# Altium PCB v2.PcbDoc
Units mm, origin at the board's own origin, x right, y up, seen from the top; angles counter-clockwise.
Board outline 87.45 x 94.54 mm, 4 copper layers (Top Layer, GND, PWR, Bottom Layer), stack 0.603 mm thick; 80 components, 70 nets, 340 pads, 95 vias.
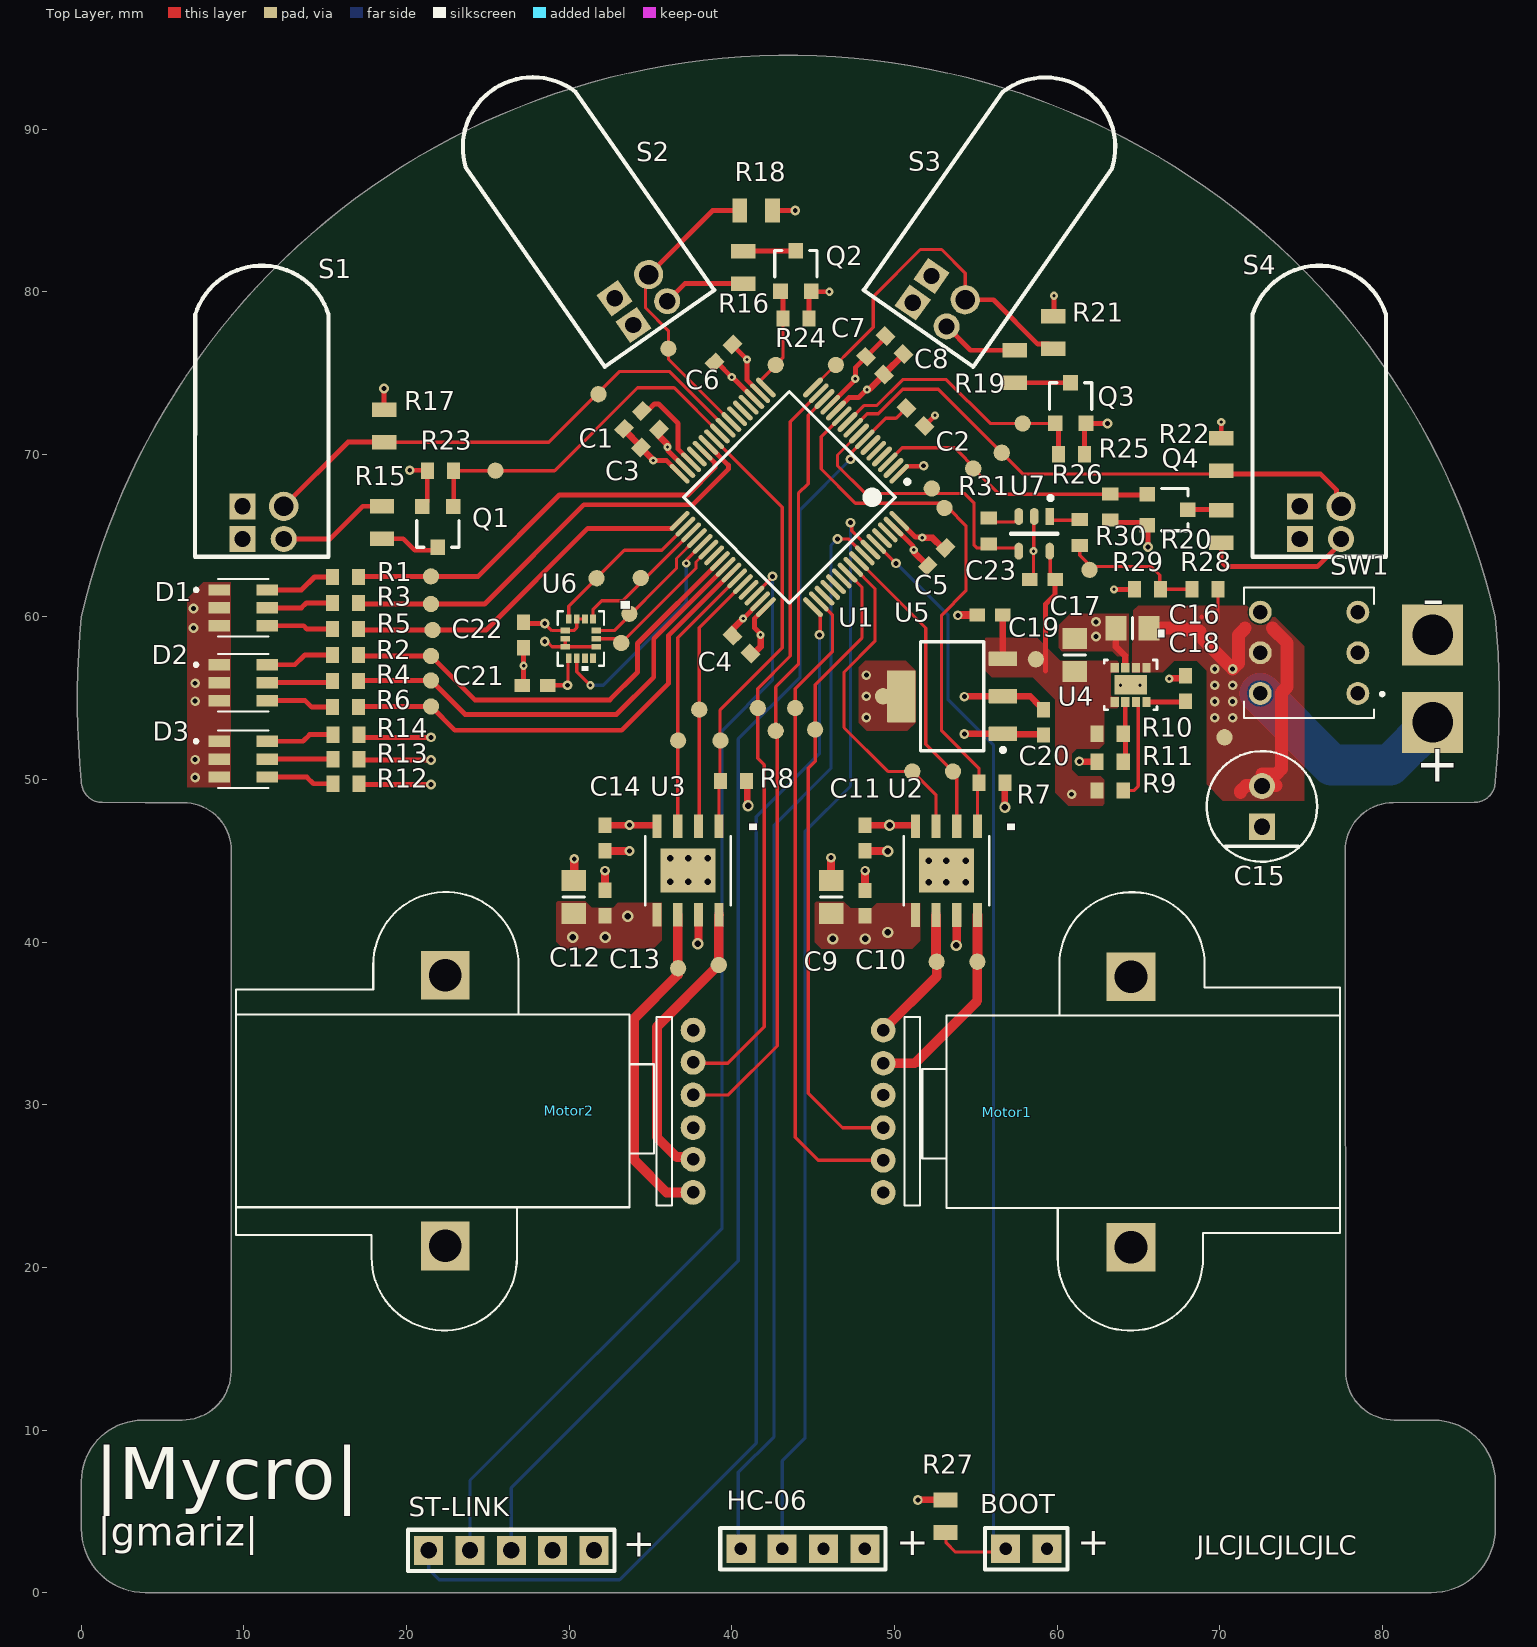
[diagram p0: Top Layer view]
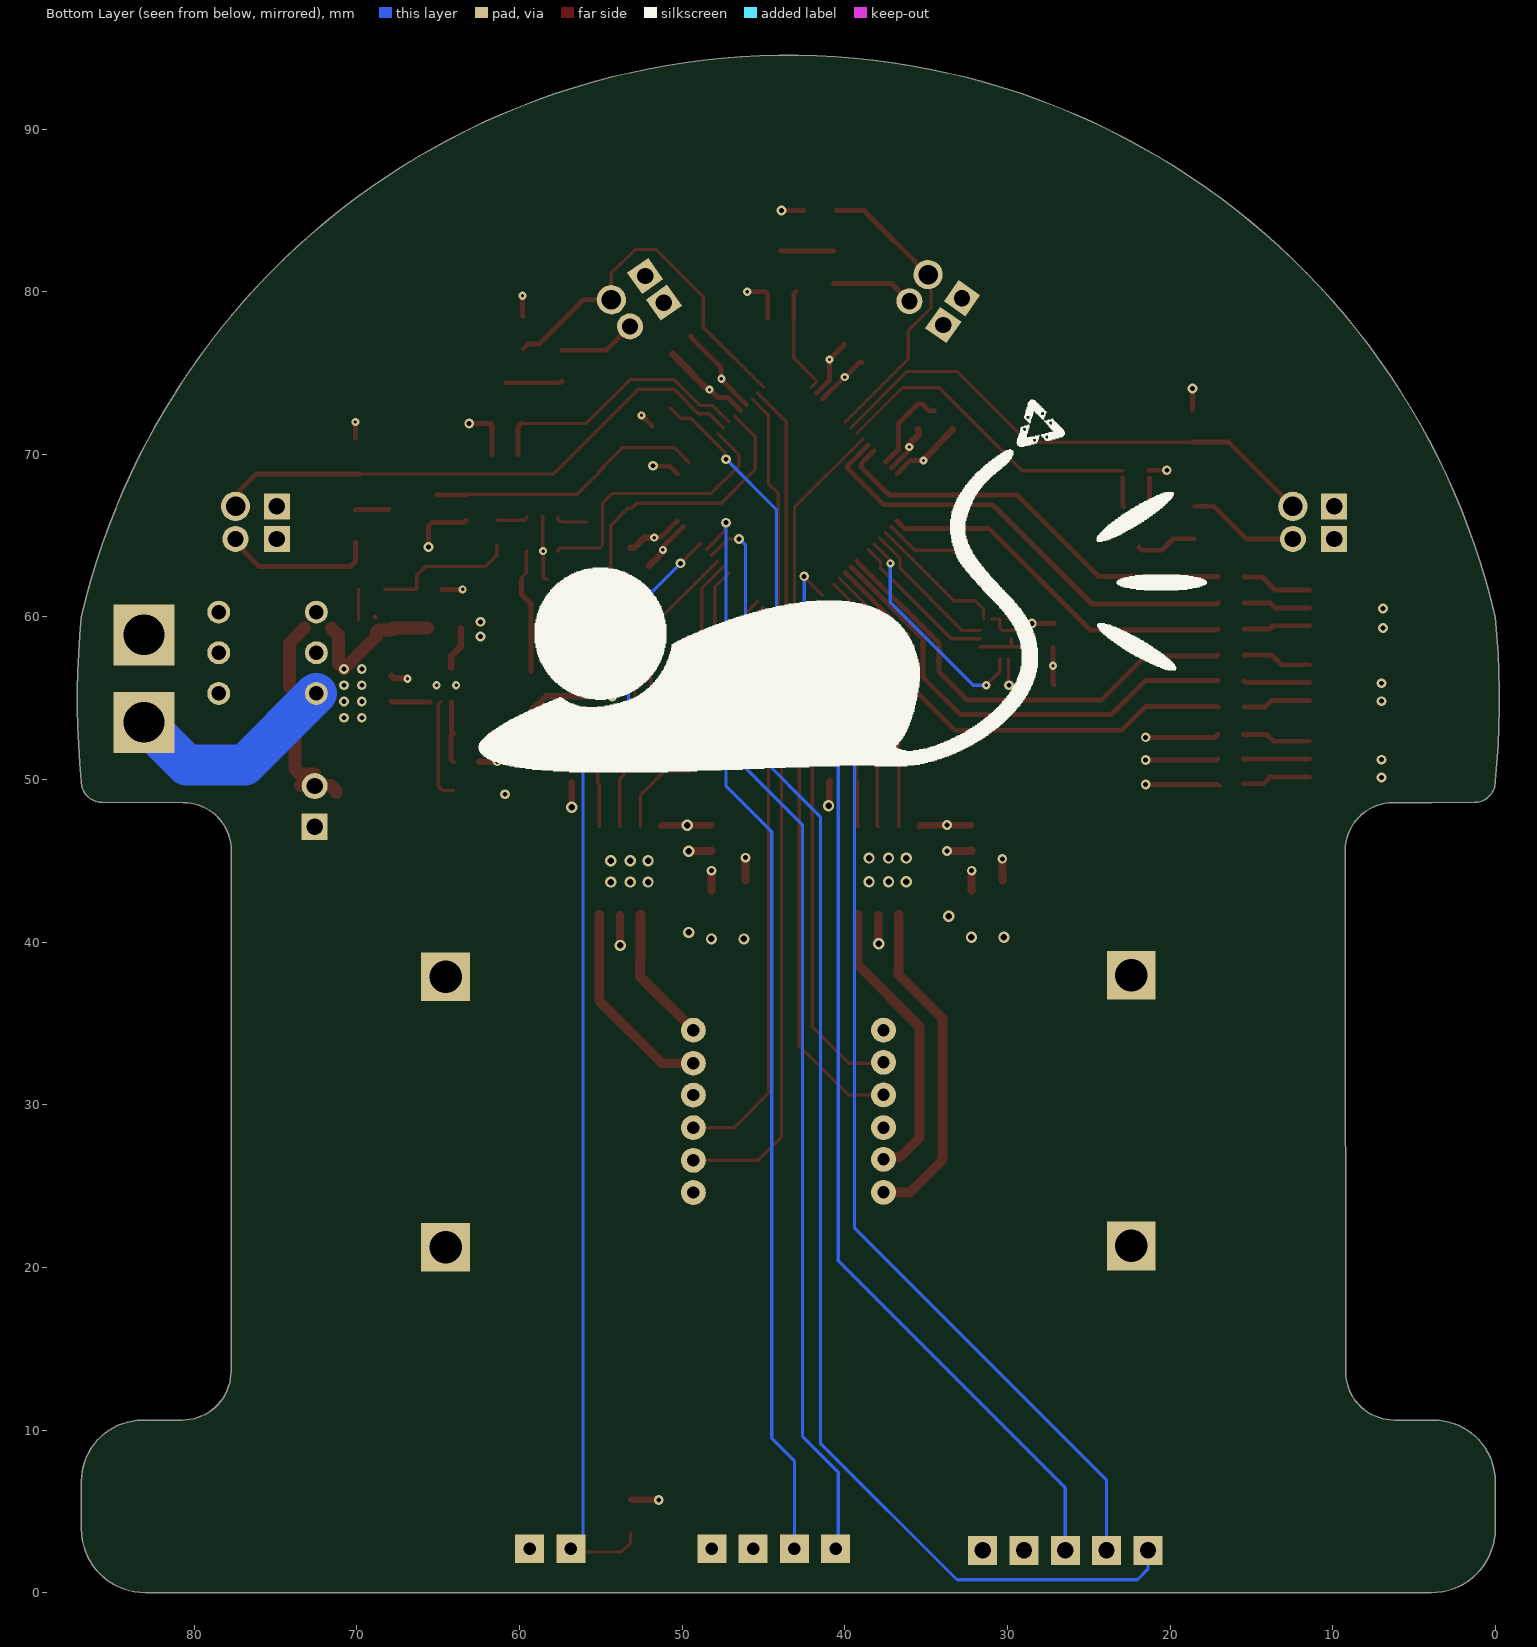
[diagram p1: Bottom Layer view, seen from below]
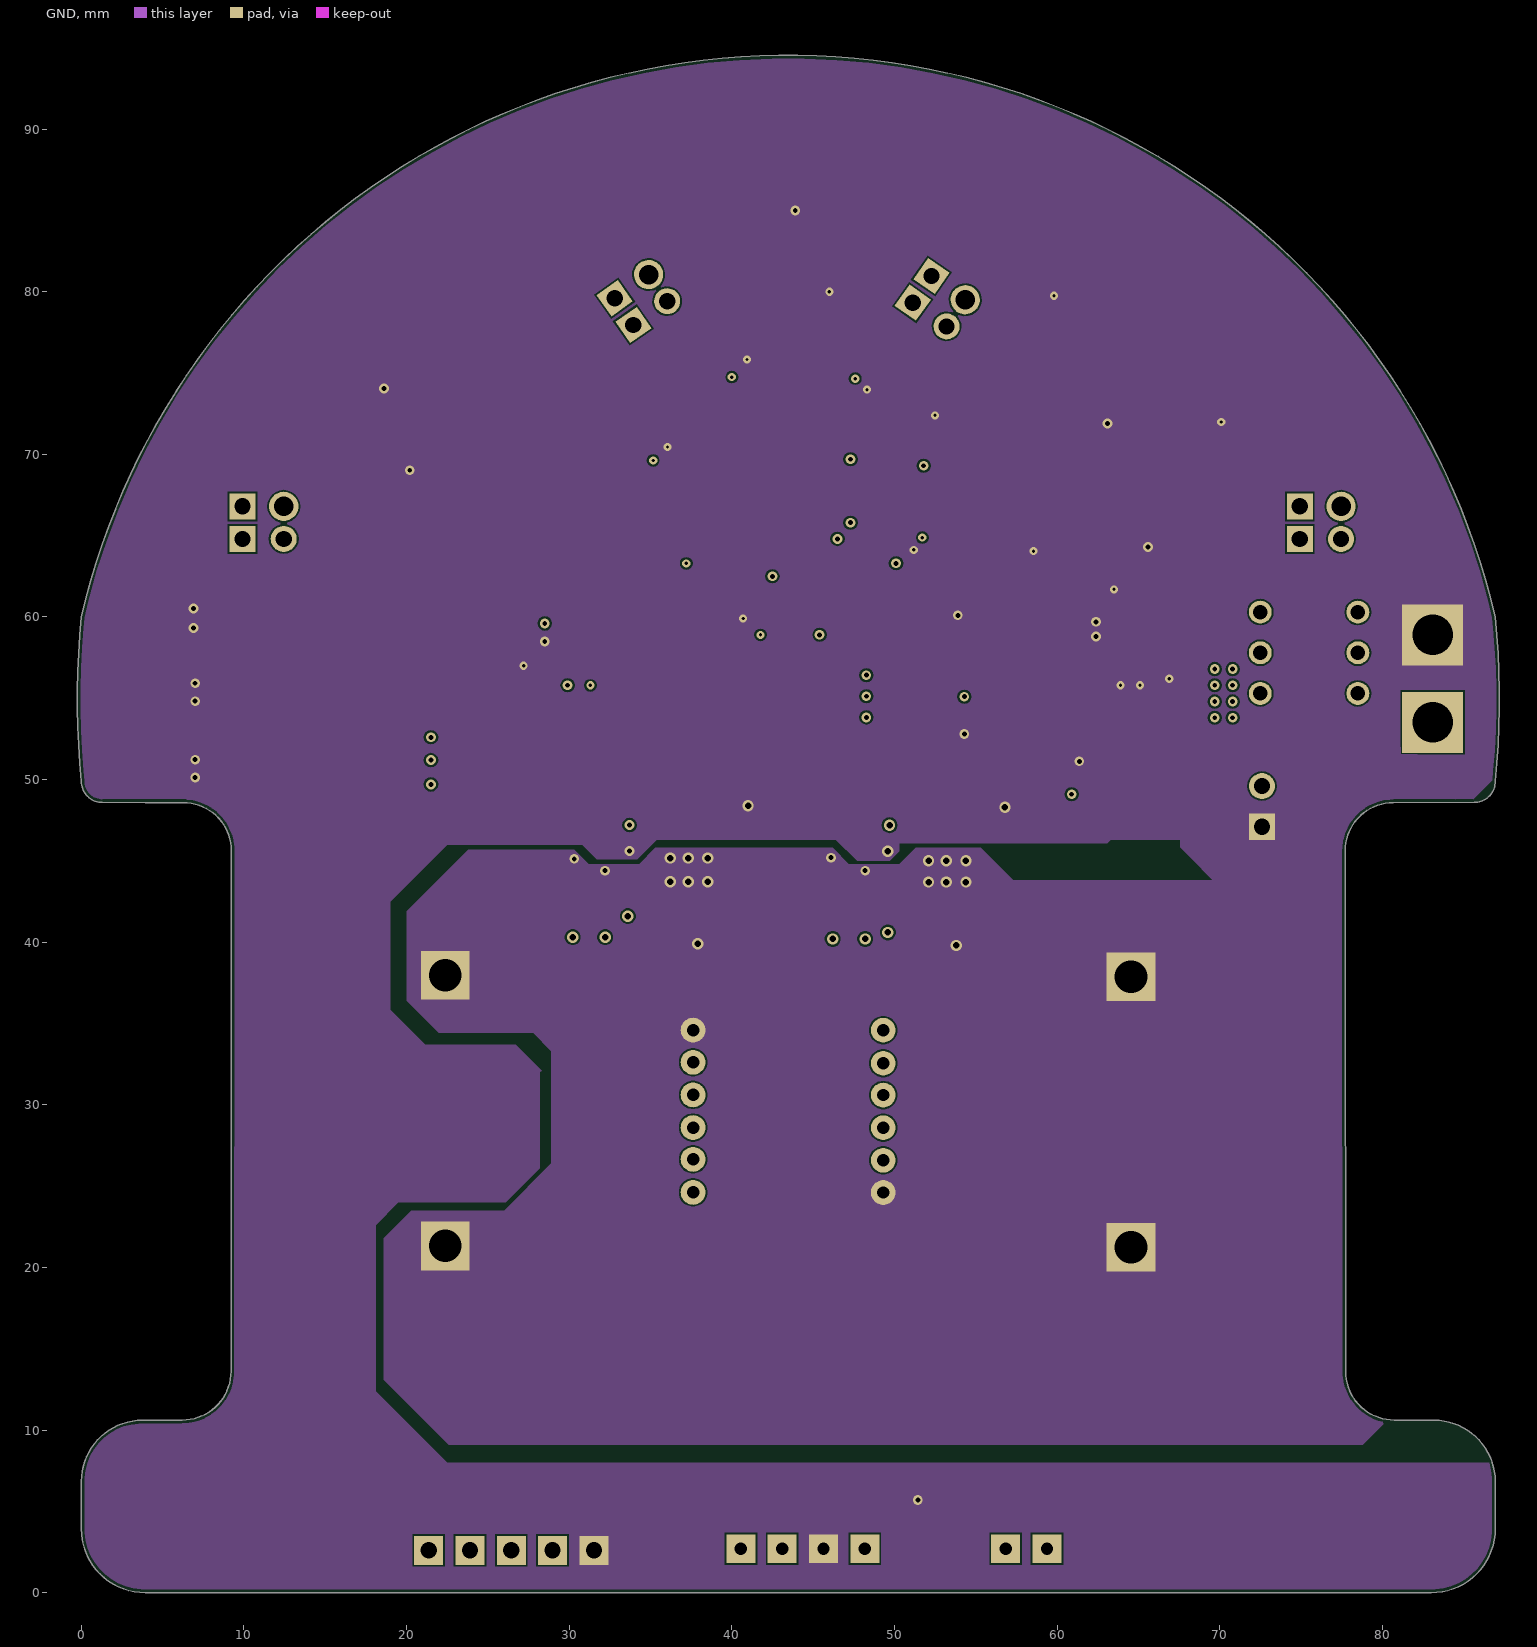
[diagram p2: GND]
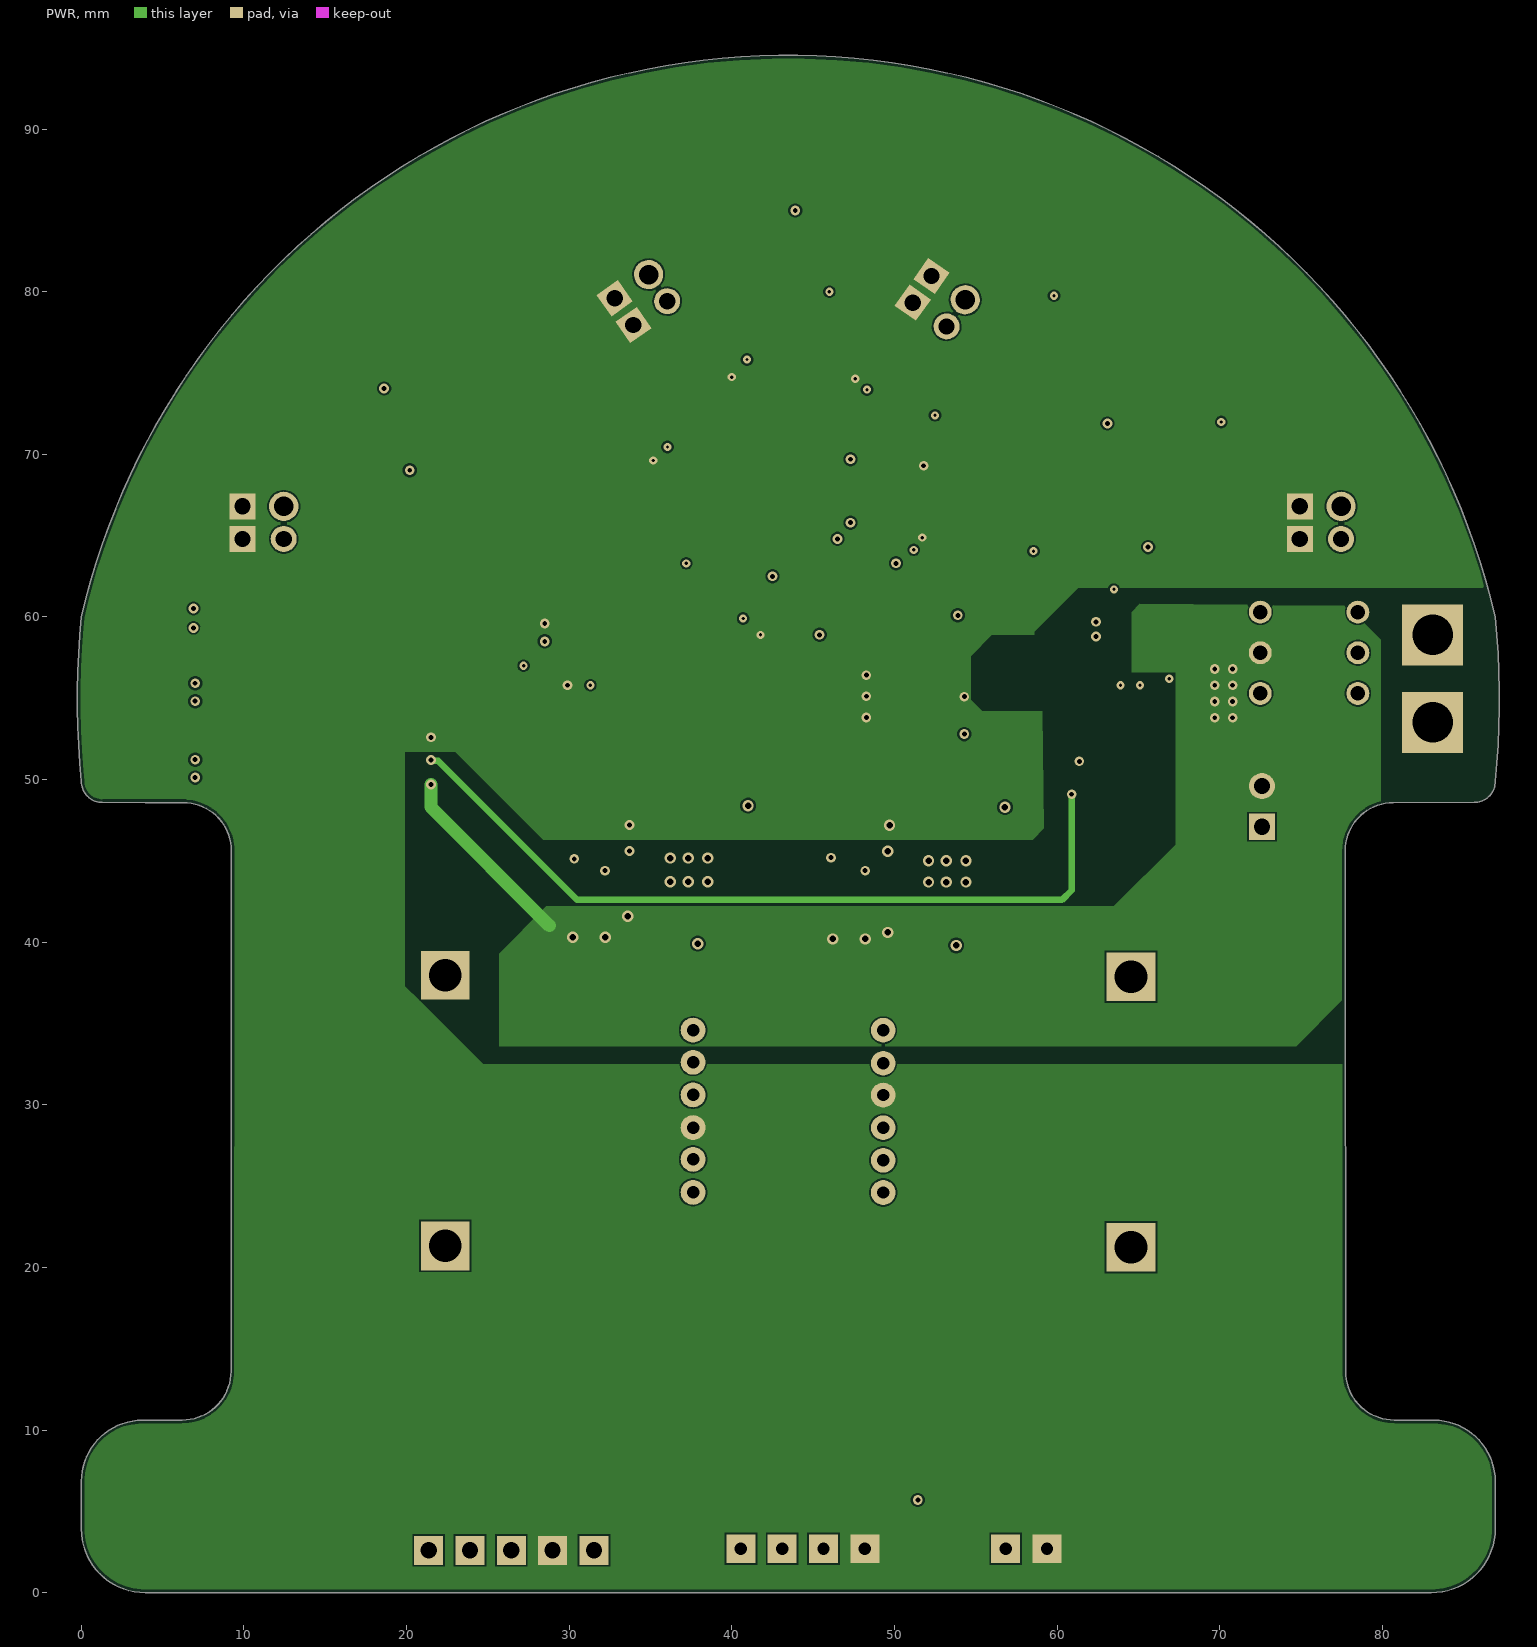
[diagram p3: PWR]

## Layer stack, top to bottom
Top Solder: solder mask 0.0102, Solder Resist, Dk 3.5
Top Layer: signal copper 0.0356
Dielectric 2: prepreg 0.0711, PP-006, Dk 4.1
GND: signal copper 0.035
Dielectric 1: dielectric 0.32, FR-4, Dk 4.8
PWR: signal copper 0.035
Dielectric 3: prepreg 0.0711, PP-006, Dk 4.1
Bottom Layer: signal copper 0.0356
Bottom Solder: solder mask 0.0102, Solder Resist, Dk 3.5

## Board outline
-0.001,3.929 ccw(c3.93,3.929) 3.93,-0.002 83.02,-0.002 ccw(c83.02,3.929) 86.951,3.929 86.952,6.838 ccw(c83.187,6.838) 83.187,10.603 80.747,10.613 cw(c80.747,13.617) 77.743,13.617 77.725,41.299 77.725,45.629 cw(c80.676,45.629) 80.676,48.58 85.657,48.592 ccw(c85.657,49.887) 86.952,49.887 ccw(c36.031,54.935) 86.95,59.998 ccw(c43.475,49.915) 0,59.998 ccw(c50.919,54.935) -0.001,49.887 ccw(c1.293,49.887) 1.293,48.592 3.914,48.586 6.274,48.58 cw(c6.274,45.629) 9.225,45.629 9.225,41.299 9.207,13.617 cw(c6.203,13.617) 6.203,10.613 3.763,10.603 ccw(c3.763,6.838) -0.002,6.838

## Design rules (kind name [scope] priority, off if disabled: settings)
BoardOutlineClearance [All] p1: gap=0.2 ignorepadtopadclearanceinfootprint=FALSE
Clearance [All] p1: gap=0.102 ignorepadtopadclearanceinfootprint=FALSE except(0.127: Arc-Via Track-Via SMDPad-Via THPad-Via Via-Via Via-Fill Via-Poly Via-Region Via-Text; 0.25: Arc-Hole Track-Hole SMDPad-Hole THPad-Hole Via-Hole Fill-Hole Poly-Hole Region-Hole Text-Hole)
ComponentClearance [All] p1: gap=0.102 collisioncheckmode=3 verticalgap=0.102 showdistances=TRUE
DiffPairsRouting [All] p1: maxlimit=0.102 minlimit=0.102 mostfreqgap=0.102 toplayer_minwidth=0.102 toplayer_maxwidth=1816.048 toplayer_prefwidth=0.102 midlayer1_minwidth=0.102 midlayer1_maxwidth=1816.048 midlayer1_prefwidth=0.102 midlayer2_minwidth=0.102 midlayer2_maxwidth=1816.048 midlayer2_prefwidth=0.102 bottomlayer_minwidth=0.102 bottomlayer_maxwidth=1816.048 bottomlayer_prefwidth=0.102 maxuncoupledlength=12.7
Height [All] p1: minheight=0 maxheight=1816.048 prefheight=12.7
HoleSize [All] p1: absolutevalues=TRUE maxlimit=6.3 minlimit=0.2 maxpercent=80.000 minpercent=20.000
HoleToHoleClearance [All] p1: gap=0.25 allowstackedmicrovias=FALSE
MinimumAnnularRing [All] p1: minimumring=0.076
MinimumSolderMaskSliver [All] p1: minsoldermaskwidth=0
PlaneClearance [All] p1: clearance=0.102
PolygonConnect PolygonConnectPowerPads [All vs (InPadClass('PowerPads'))] p1: connectstyle=Direct reliefconductorwidth=0.254 reliefentries=4 polygonreliefangle="90 Angle" airgapwidth=0.254
PolygonConnect [All] p2: connectstyle=Direct reliefconductorwidth=0.102 reliefentries=4 polygonreliefangle="90 Angle" airgapwidth=0.102
RoutingVias [All] p1: holewidth=0.2 width=0.45 viastyle="Through Hole" minholewidth=0.2 minwidth=0.45 maxholewidth=6.3 maxwidth=6.55
SilkToSilkClearance [All] p1: silktosilkclearance=0
SilkToSolderMaskClearance [IsPad] p1: minsilkscreentomaskgap=0.102 clearancetoexposedcopper=TRUE
SolderMaskExpansion [All] p1: expansion=0.075 istentingtop=FALSE
SupplyNets "Schematic Supply Nets_4" [InNet('GND')] p1: voltage=0.000
SupplyNets "Schematic Supply Nets_3" [InNet('VCC')] p2: voltage=0.000
SupplyNets "Schematic Supply Nets_2" [InNet('+3V3')] p3: voltage=0.000
SupplyNets "Schematic Supply Nets_1" [InNet('Vbat')] p4: voltage=0.000
SupplyNets "Schematic Supply Nets" [InNet('+5')] p5: voltage=0.000
Width [All] p1: maxlimit=1816.048 minlimit=0.102 preferedwidth=0.102
21 further rules are at their usual default settings.

## Classes and differential pairs
component class 5_power: + - C15 C16 C17 C18 C19 C20 C23 D3 R9 R10 R11 R12 R13 R14 R28 R29 R30 R31 SW1 U4 U5 U7
component class 4_sensores: Q1 Q2 Q3 Q4 R15 R16 R17 R18 R19 R20 R21 R22 R23 R24 R25 R26 S1 S2 S3 S4
component class 3_imu: C21 C22 U6
component class 2_drivers_e_Motores: C9 C10 C11 C12 C13 C14 Motor1 Motor2 R7 R8 U2
component class 1_micro: BOOT C1 C2 C3 C4 C5 C6 C7 C8 D1 D2 HC-06 R1 R2 R3 R4 R5 R6 R27 ST-LINK U1

## Components (designator, comment, footprint, x,y, rotation, side; value= is the part's Value field where it differs from the comment)
+ "FURO" FURO_2,5MM 83.1,53.523 r0 top
- "FURO" FURO_2,5MM 83.1,58.9 r0 top
BOOT "CONECTOR_2PIN" CON2 56.843,2.7 r0 top
C1 "CAP" 0603 33.916,72.128 r225 top
C2 "CAP" 0603 51.291,72.303 r135 top
C3 "CAP" 0603 34.966,70.978 r225 top
C4 "CAP" 0603 40.6,58.3 r315 top
C5 "CAP" 0603 52.6,63.7 r45 top
C6 "CAP" 0603 39.497,76.2 r225 top
C7 "CAP" 0603 48.816,75.453 r135 top
C8 "CAP" 0603 50.016,76.728 r135 top
C9 "CAP" "CAP 0805" 46.118,42.778 r270 top
C10 "CAP" 0603 48.2,42.4 r270 top
C11 "CAP" 0603 48.2,46.4 r90 top
C12 "CAP" "CAP 0805" 30.291,42.784 r270 top
C13 "CAP" 0603 32.196,42.403 r270 top
C14 "CAP" 0603 32.211,46.406 r90 top
C15 "56uF" FP-PSG-F05-MFG 72.6,48.35 r90 top
C16 "CAP" "CAP 0805" 64.643,59.309 r0 top
C17 "CAP" "CAP 0805" 61.087,57.658 r270 top
C18 "CAP" 0603 67.9,55.6 r270 top
C19 "CAP" 0603 55.873,60.123 r0 top
C20 "CAP" 0603 59.173,53.523 r90 top
C21 "CAP" 0603 27.9,55.8 r0 top
C22 "CAP" 0603 27.2,58.9 r90 top
C23 "CAP" 0603 59.1,62.315 r0 top
D1 "KRTBLSLPS1.32-VUVX-EQ+BTBV-D8+TWTZ-L1-B" LED_KRTBLSLPS1.32-VUVX-EQ+BTBV-D8+TWTZ-L1-B 9.954,60.56 r0 top
D2 "KRTBLSLPS1.32-VUVX-EQ+BTBV-D8+TWTZ-L1-B" LED_KRTBLSLPS1.32-VUVX-EQ+BTBV-D8+TWTZ-L1-B 9.954,55.96 r0 top
D3 "KRTBLSLPS1.32-VUVX-EQ+BTBV-D8+TWTZ-L1-B" LED_KRTBLSLPS1.32-VUVX-EQ+BTBV-D8+TWTZ-L1-B 9.954,51.256 r0 top
HC-06 "" CON4 40.56,2.7 r0 top
Motor1 "Micro Motor c/ Encoder" "Micro Metal c/ Encoder" 51.312,13.606 r0 top
Motor2 "Micro Motor c/ Encoder" "Micro Metal c/ Encoder" 35.619,45.595 r180 top
Q1 "2N7002" STM-SOT-23-3_V 21.919,65.545 r180 top
Q2 "2N7002" STM-SOT-23-3_V 43.942,81.28 r0 top
Q3 "2N7002" STM-SOT-23-3_V 60.833,73.152 r0 top
Q4 "2N7002" STM-SOT-23-3_V 66.8,66.6 r270 top
R1 "RESISTOR" "RES 0603" 16.254,62.461 r180 top value=100R
R2 "RESISTOR" "RES 0603" 16.254,57.66 r180 top value=100R
R3 "RESISTOR" "RES 0603" 16.254,60.861 r180 top value=100R
R4 "RESISTOR" "RES 0603" 16.254,56.06 r180 top value=100R
R5 "RESISTOR" "RES 0603" 16.254,59.26 r180 top value=100R
R6 "RESISTOR" "RES 0603" 16.254,54.46 r180 top value=100R
R7 "RESISTOR" "RES 0603" 56,49.8 r180 top value=1k
R8 "RESISTOR" "RES 0603" 40.111,49.906 r180 top value=1k
R9 "RESISTOR" "RES 0603" 63.273,49.323 r0 top value=100k
R10 "RESISTOR" "RES 0603" 63.273,52.823 r180 top value=52k3
R11 "RESISTOR" "RES 0603" 63.273,51.097 r0 top value=10k
R12 "RESISTOR" "RES 0603" 16.283,49.748 r0 top value=1k
R13 "RESISTOR" "RES 0603" 16.283,51.256 r0 top value=1k
R14 "RESISTOR" "RES 0603" 16.283,52.764 r0 top value=100R
R15 "RESISTOR" "RES 0805" 18.49,65.812 r90 top value=180R
R16 "RESISTOR" "RES 0805" 40.7,81.5 r270 top value=180R
R17 "RESISTOR" "RES 0805" 18.617,71.752 r270 top value=68R
R18 "RESISTOR" "RES 0805" 41.5,85 r180 top value=68R
R19 "RESISTOR" "RES 0805" 57.4,75.4 r90 top value=180R
R20 "RESISTOR" "RES 0805" 70.1,65.574 r270 top value=180R
R21 "RESISTOR" "RES 0805" 59.773,77.49 r270 top value=68R
R22 "RESISTOR" "RES 0805" 70.1,70 r270 top value=68R
R23 "RESISTOR" "RES 0603" 22.1,69 r0 top value=100k
R24 "RESISTOR" "RES 0603" 43.942,78.359 r180 top value=100k
R25 "RESISTOR" "RES 0603" 60.9,70 r180 top value=100k
R26 "RESISTOR" "RES 0603" 63.274,66.751 r90 top value=100k
R27 "RESISTOR" "RES 0805" 53.143,4.7 r270 top value=10k
R28 "RESISTOR" "RES 0603" 69.1,61.7 r0 top value=100k
R29 "RESISTOR" "RES 0603" 65.569,61.7 r0 top value=62k
R30 "RESISTOR" "RES 0603" 61.4,65.2 r90 top value=1k
R31 "RESISTOR" "RES 0603" 55.8,65.3 r90 top value=1k
S1 "SFH4550 & SFH313" umouse-sensor-fp 9.906,64.802 r0 top
S2 "SFH4550 & SFH313" umouse-sensor-fp 33.947,77.962 r35 top
S3 "SFH4550 & SFH313" umouse-sensor-fp 51.128,79.327 r325 top
S4 "SFH4550 & SFH313" umouse-sensor-fp 74.93,64.802 r0 top
ST-LINK "CONECTOR_5PIN" CON5 31.52,2.6 r180 top
SW1 "TL2285EE" SW_TL2285EE 75.5,57.8 r90 top
U1 "STM32F411RET6TR" STM-LQFP64_L 43.545,67.36 r225 top
U2 "DRV8251ADDAR" SOIC8_DDA_TEX 53.2,44.4 r270 top
U3 "DRV8251ADDAR" SOIC8_DDA_TEX 37.311,44.406 r270 top
U4 "TPS82140SILR" SIL0008D_SMD 64.523,55.823 r270 top
U5 "TLV1117LV33" DCY0004A_N 53.548,55.123 r180 top
U6 "LSM6DSRXTR" LGA-14L_STM 30.719,58.664 r270 top
U7 "MCP6001UT-I/OT" FP-C04-091-OT-IPC_C 58.6,65.115 r270 top

## Footprints (in the part's own frame and the unit in brackets; to place one, negate y for a bottom-side part, rotate by r counter-clockwise, add the part's x,y. Pads: shape width x height; smd on the part's side, far side on the other; paste and mask are expansions set on the pad)
0603 [mm]
  rect 0.95x0.8 smd: 1(-0.78,0) 2(0.78,0)
  body extent -0.8,-0.4 0.8,0.4, height 0.78
"CAP 0805" [mm] "0805"
  rect 1.3x1.5 smd: 1(-1.016,0) 2(1.016,0)
  silkscreen extent 0,-0.65 0,0.65, body extent -1.03,-0.61 0.97,0.59, height 0.88
CON2 [mil]
  rect 70x70 hole 30: 1(0,0) 2(100,0)
  silkscreen extent -50,-50 150,50, body extent -42,-47 143,45, height 519
CON4 [mil]
  rect 70x70 hole 30: 1(0,0) 2(100,0) 3(200,0) 4(300,0)
  silkscreen extent -50,-50 350,50, body extent -50,-47 343,45, height 519
CON5 [mil]
  rect 70x70 hole 39.37: 1(0,0) 2(100,0) 3(200,0) 4(300,0) 5(400,0)
  silkscreen extent -50,-50 450,50, body extent -50,-47 443,45, height 519
DCY0004A_N [mm] "SOT223, 4-Leads, Body 6.7x3.7mm, Pitch 2.3mm, IPC Medium Density"
  rrect11% 1.75x0.9 smd: 1(-3.125,2.3) 2(-3.125,0) 3(-3.125,-2.3)
  rrect6% 1.75x3.2 smd: 4(3.125,0)
  silkscreen extent -3.25,-3.35 1.95,3.42, body extent -3.5,-3.25 3.5,3.25, height 1.62
FP-C04-091-OT-IPC_C [mm]
  rect 1.038x0.538 smd paste+0 mask+0: 1(-1.066,0.95)
  rrect100% 1.038x0.538 smd paste+0 mask+0: 2(-1.066,0) 3(-1.066,-0.95) 4(1.066,-0.95) 5(1.066,0.95)
  silkscreen extent -2.32,-1.45 0.05,1.45
FP-PSG-F05-MFG [mm]
  rect 1.6x1.6 hole 1 paste-2539.97 mask+0: 1(-1.25,0)
  round 1.6 hole 1 paste-2539.97 mask+0: 2(1.25,0)
  silkscreen extent -3.4,-3.4 3.4,3.4, body extent -3.5,-3.5 3.5,3.5, height 0.25
FURO_2,5MM [mm]
  rect 3.75x3.75 hole 2.5: 1(0,0)
LED_KRTBLSLPS1.32-VUVX-EQ+BTBV-D8+TWTZ-L1-B [mm]
  rect 1.3x0.7 smd paste-0.05: A1(1.475,1.1) A2(1.475,0) A3(1.475,-1.1) C1(-1.475,1.1) C2(-1.475,0) C3(-1.475,-1.1)
  silkscreen extent -3,-1.77 1.55,1.77
LGA-14L_STM [mm]
  rect 0.577x0.352 smd paste+0 mask+0.05: 1(-1.21,0.75) 2(-1.21,0.25) 3(-1.21,-0.25) 4(-1.21,-0.75) 8(1.21,-0.75) 9(1.21,-0.25) 10(1.21,0.25) 11(1.21,0.75)
  rect 0.352x0.577 smd paste+0 mask+0.05: 5(-0.5,-0.956) 6(0,-0.956) 7(0.5,-0.956) 12(0.5,0.956) 13(0,0.956) 14(-0.5,0.956)
  silkscreen extent -1.68,-1.42 1.96,1.42, body extent -1.55,-1.3 1.55,1.3, height 0.87
"Micro Metal c/ Encoder" [mil] "Motor pololu com encoder e mancal acoplados"
  round 60 hole 30: 1(-78.74,433.07) 2(-78.74,511.07) 3(-78.74,590.07) 4(-78.74,669.07) 5(-78.74,746.07) 6(-78.74,826.07)
  rect 118.11x118.11 hole 78.74: 1(521.18,300.5) 1(521.18,955.5)
  silkscreen extent -28,99 1028,1160, body extent -193,0 1402,1259, height 866
"RES 0603" [mm]
  rect 0.8x1 smd: 1(-0.8,0) 2(0.8,0)
  body extent -0.8,-0.41 0.8,0.41, height 0.46
"RES 0805" [mm] "0805 (1/8W)"
  rect 0.9x1.5 smd: 1(-1,0) 2(1,0)
  body extent -1.02,-0.62 0.95,0.6, height 0.48
SIL0008D_SMD [mm]
  rect 0.6x0.5 smd paste-0.05 mask-0.051: 1(-1.05,0.975) 2(-1.05,0.325) 3(-1.05,-0.325) 4(-1.05,-0.975) 5(1.05,-0.975) 6(1.05,-0.325) 7(1.05,0.325) 8(1.05,0.975)
  rect 1.2x2 smd paste-0.6 mask-0.051: 9(0,0)
  silkscreen extent -1.53,-1.63 1.53,1.63, body extent -1.4,-1.5 1.4,1.5, height 1.31
SOIC8_DDA_TEX [mil]
  rect 57.5x22 smd paste+0 mask+0: 1(-107.25,75) 2(-107.25,25) 3(-107.25,-25) 4(-107.25,-75) 5(107.25,-75) 6(107.25,-25) 7(107.25,25) 8(107.25,75)
  rect 107x134 smd paste-66.5 mask+0: 9(0,0)
  silkscreen extent -84,-104 84,104, body extent -122,-99 122,99, height 67
STM-LQFP64_L [mm] "QFP, 64-Leads, Body 10x10mm, Pitch 0.5mm, IPC High Density"
  oval 1.6x0.3 smd: 1(-5.8,3.75) 2(-5.8,3.25) 3(-5.8,2.75) 4(-5.8,2.25) 5(-5.8,1.75) 6(-5.8,1.25) 7(-5.8,0.75) 8(-5.8,0.25) 9(-5.8,-0.25) 10(-5.8,-0.75) 11(-5.8,-1.25) 12(-5.8,-1.75) 13(-5.8,-2.25) 14(-5.8,-2.75) 15(-5.8,-3.25) 16(-5.8,-3.75) 33(5.8,-3.75) 34(5.8,-3.25) 35(5.8,-2.75) 36(5.8,-2.25) 37(5.8,-1.75) 38(5.8,-1.25) 39(5.8,-0.75) 40(5.8,-0.25) 41(5.8,0.25) 42(5.8,0.75) 43(5.8,1.25) 44(5.8,1.75) 45(5.8,2.25) 46(5.8,2.75) 47(5.8,3.25) 48(5.8,3.75)
  oval 0.3x1.6 smd: 17(-3.75,-5.8) 18(-3.25,-5.8) 19(-2.75,-5.8) 20(-2.25,-5.8) 21(-1.75,-5.8) 22(-1.25,-5.8) 23(-0.75,-5.8) 24(-0.25,-5.8) 25(0.25,-5.8) 26(0.75,-5.8) 27(1.25,-5.8) 28(1.75,-5.8) 29(2.25,-5.8) 30(2.75,-5.8) 31(3.25,-5.8) 32(3.75,-5.8) 49(3.75,5.8) 50(3.25,5.8) 51(2.75,5.8) 52(2.25,5.8) 53(1.75,5.8) 54(1.25,5.8) 55(0.75,5.8) 56(0.25,5.8) 57(-0.25,5.8) 58(-0.75,5.8) 59(-1.25,5.8) 60(-1.75,5.8) 61(-2.25,5.8) 62(-2.75,5.8) 63(-3.25,5.8) 64(-3.75,5.8)
  silkscreen extent -5.92,-4.6 4.6,4.6, body extent -5,-5 5,5, height 1.6
STM-SOT-23-3_V [mm] "SOT23, 3-Leads, Body 3.016x2.8mm, Pitch 0.95mm"
  rect 0.9x0.95 smd: 1(-0.95,-1.25) 2(0.95,-1.25) 3(0,1.25)
  silkscreen extent -1.3,-0.38 1.3,1.25, body extent -1.14,-1.25 1.17,1.36, height 1.25
SW_TL2285EE [mm]
  round 1.408 hole 0.9: 1(-2.5,-3) 2(0,-3) 3(2.5,-3) 4(-2.5,3) 5(0,3) 6(2.5,3)
  silkscreen extent -4,-4.6 4,4, body extent -4,-4 4,4, height 13.5
umouse-sensor-fp [mm]
  rect 1.6x1.6 hole 1 mask+0: 1(0,0) 4(0,2)
  round 1.6 hole 1 mask+0: 2(2.54,0)
  round 1.8 hole 1.2 mask+0: 3(2.54,2)
  silkscreen extent -2.92,-1.1 5.3,16.8, body extent -2.8,-0.3 5.2,14.3, height 13.5

## Part data
+ -: library part "FURO NA PLACA", "Furo", Criado em=26/06/2012, Criado por="Luigi Eduardo", Pertence a="Trincabotz CEFET-MG"
C1 C2 C3 C4 C5 C6 C7 C8 C9 C10 C11 C12 C13 C14 C16 C17 C18 C19 C20 C21 C22 C23: library part "CAP. CERÂMICO", "Capacitor", Criado em=26/06/2012, Criador por="Luigi Eduardo", Pertence a=Trincabotz
  C1 C3: Valor=4.7uF
  C2 C5 C6 C7 C8 C10 C11 C13 C14 C19 C20 C21 C22 C23: Valor=100nF
  C4: Valor=1uF
  C9 C12 C16 C17: Valor=22uF
  C18: Valor=33nF
C15: library part CMP-33769-000002-1, "CAP ALUM POLY 56UF 20% 25V T/H / APSG250ELL560MF05S / https://www.mouser.com/ProductDetail/Chemi-Con/APSG250ELL560MF05S?qs=nxZbHzLpdvcfhTNzSmDv4w%3D%3D", Leakage Current=500uA, Manufacturer="United Chemi-Con", Manufacturer Part Number=APSG250ELL560MF05S, Package=PSG-F05, Ripple Current=2600mA, Temperature="-55°C to +105°C", Temperature Range High=+105°C, Temperature Range Low=-55°C, Tolerance=20%, Voltage Rating=25V, Automotive=No, Capacitance=56uF, Category=Cap, ComponentLink2Description=Datasheet, ComponentLink2URL=http://www.chemi-con.co.jp/cgi-bin/CAT_DB/SEARCH/cat_db_al.cgi?e=e&j=p&pdfname=psg, Device Class L1="Passive Components", Device Class L2=Capacitors, Device Class L3="Polymer Capacitors", Digikey Description="CAP ALUM POLY 56UF 20% 25V T/H", Dissipation Factor=12%, Esr=30mΩ, Height=6mm, Lead Free=Yes, Life=15000Hours, Material=Polymer, Octopart=https://octopart.com/apsg250ell560mf05s-united+chemi-con-70515924, RoHS=TRUE
D1 D2 D3: "Red, Green, Blue (RGB) 621nm Red, 532nm Green, 467nm Blue LED Indication - Discrete 2.05V Red, 2.65V Green, 2.85V Blue 6-SMD, J-Lead", Package="SMD-6 OSRAM Opto Semiconductors Inc.", Availability="In Stock", Check_prices=https://www.snapeda.com/parts/KRTBLSLPS1.32-VUVX-EQ+BTBV-D8+TWTZ-L1-B/OSRAM+Opto+Semiconductors+Inc./view-part/?ref=eda, MF="OSRAM Opto Semiconductors Inc.", MP=KRTBLSLPS1.32-VUVX-EQ+BTBV-D8+TWTZ-L1-B, Price=None, Purchase-URL=https://pricing.snapeda.com/search/part/KRTBLSLPS1.32-VUVX-EQ+BTBV-D8+TWTZ-L1-B/?ref=eda, SnapEDA_Link=https://www.snapeda.com/parts/KRTBLSLPS1.32-VUVX-EQ+BTBV-D8+TWTZ-L1-B/OSRAM+Opto+Semiconductors+Inc./view-part/?ref=snap
HC-06: library part CONECTOR_4PIN
Q1 Q2 Q3 Q4: library part CMP-0434-00001-1, "N-channel 60 V, 1.8 Ohm, 0.35 A STripFET(TM) II Power MOSFET, SOT23", Manufacturer=STMicroelectronics, ComponentLink1Description="Manufacturer URL", ComponentLink1URL=http://www.st.com/, ComponentLink2Description=Datasheet, ComponentLink2URL=http://www.st.com/st-web-ui/static/active/en/resource/technical/document/datasheet/CD00005134.pdf, DatasheetVersion="Rev. 9, 11/2008", Mounting Technology="Surface Mount", PackageDescription="3-Pin SOT23, 3.016 x 2.8 mm Body, 0.95 mm Pitch", PackageReference=SOT-23, PartNumber=2N7002
R1 R2 R3 R4 R5 R6 R7 R8 R9 R10 R11 R12 R13 R14 R15 R16 R17 R18 R19 R20 R21 R22 R23 R24 R25 R26 R27 R28 R29 R30 R31: "Resistor"
SW1: Package=None, Availability=Unavailable, MP=TL2285EE, Price=None
U1: library part CMP-0243-00169-2, "ARM Cortex-M4 32-bit MCU+FPU, 512 KB Flash, 128 KB RAM, 50 I/Os, 64-Pin LQFP, -40 to 85 degC, Tape and Reel", I/Os (High Current)=50, Operating Frequency(F) (Processor speed) (MHz)=100, Package Description=LQFP64, Package Reference="64-Pin Low-profile Quad Flat Package, Body 10 x 10 mm, Pitch 0.5 mm", Supply Voltage(Vcc) min (V)=1.7, ComponentLink1Description="Manufacturer URL", ComponentLink1URL=http://www.st.com/, ComponentLink2Description=Datasheet, ComponentLink2URL=http://www.st.com/st-web-ui/static/active/en/resource/technical/document/datasheet/DM00115249.pdf, Core="ARM Cortex-M4", DatasheetVersion="Rev. 6", FLASH Size (Prog) (kB)=512, Internal RAM Size (kB)=128, Mounting Technology="Surface Mount", Packing="Tape and Reel"
U2 U3 U4: "No Description Available", Mfr_Name="Texas Instruments", RefDes=RefDes
  U2 U3: Type=Type
  U4: Type=TYPE
U5: library part CMP-0395-00503-2, "Single Output LDO, 1 A, Fixed 3.3 V Output, 2 to 5.5 V Input, 4-pin SOT-223 (DCY), -40 to 125 degC, Green (RoHS & no Sb/Br)", Manufacturer="Texas Instruments", PartNumber=TLV1117LV33DCYR, Accuracy(%)=2, Code_JEDEC=TO-261, ComponentLink1Description="Manufacturer URL", ComponentLink1URL=http://www.ti.com/, ComponentLink2Description=Datasheet, ComponentLink2URL=http://www.ti.com/general/docs/lit/getliterature.tsp?genericPartNumber=TLV1117LV33&fileType=pdf, ComponentLink3Description="Package Specification", ComponentLink3URL=http://www.ti.com/litv/pdf/mpds094a, DatasheetVersion=SBVS160A, Eco-Plan="Green (RoHS & no Sb/Br)", Fixed Output Options(V)=3.3, Iout(Max)(A)=1, Iq(Typ)(mA)=0.05, Mounting Technology="Surface Mount", PackageDescription="4-Pin Plastic Small Outline, Body 3.5 x 6.5 mm, Pitch 2.3 mm", PackageReference=DCY0004A, PackageVersion=4202506/B, SubFamily="Single Channel LDO", Vdo(Typ)(mV)=1200, Vin(Max)(V)=5.5, Vin(Min)(V)=2, Vout Adj(Max)(V)=3.3, Vout Adj(Min)(V)=3.3
U6: "No Description Available", Mfr_Name=STMicroelectronics, RefDes=RefDes, Type=Type
U7: library part CMP-0187-00471-3, "IC OPAMP GP 1 CIRCUIT SOT23-5", Case/Package=SOT-23, Input Bias Current=1pA, Input Offset Voltage (Vos)=4.5mV, Max Frequency=1kHz, Max Operating Temperature=85°C, Max Supply Voltage=6V, Min Operating Temperature=-40°C, Min Supply Voltage=1.8V, Nominal Supply Current=100uA, Operating Supply Voltage=5.5V, Output Current=23mA, Package Quantity=3000, Power Supply Rejection Ratio (PSRR)=86dB, Voltage Gain=112dB, Bandwidth=1MHz, Common Mode Rejection Ratio=60dB, Gain Bandwidth Product=1MHz, Height=1.3mm, Lead Free="Lead Free", Length=3.1mm, Mount="Surface Mount", Number of Amplifiers=1, Number of Channels=1, Number of Circuits=1, Number of Elements=1, Number of Pins=5, Packaging="Tape and Reel", Radiation Hardening=No, REACH SVHC="No SVHC", Slew Rate=0.6V/µs, Unity Gain Bandwidth Product=1MHz, Width=1.8mm

## Free pads (board coordinates)
  round 1 smd paste-2539.97: 2(21.5,62.5) 3(21.5,60.8) 4(21.6,59.2) 5(31.685,62.385) 6(34.4,62.4) 7(33.7,60.2) 8(33.2,58.4) 9(21.5,57.6) 10(21.5,56.1) 11(21.5,54.5) 14(46.4,75.5) 16(52.3,67.9) 16(57.89,71.902) 16(62,62.9) 17(56.6,70.1) 18(54.848,69.132) 20(58.7,57.4) 21(49.298,55.123) 22(70.3,52.6) 23(51.1,50.5) 24(53.6,50.5) 26(39.3,52.4) 27(38,54.3) 28(36.7,52.4) 29(36.1,76.5) 30(31.8,73.7) 32(53.077,66.707) 33(52.6,38.8) 34(55.1,38.8) 35(39.2,38.6) 36(36.7,38.4) 37(45.127,53.077) 38(43.9,54.4) 39(42.7,53) 40(41.6,54.4) 41(42.7,75.5)
  round 1 smd: 31(25.466,68.997)

## Via types
v1: diameter 0.6, hole 0.3, Top Layer to Bottom Layer, tented both sides, 49 vias
v2: diameter 0.5, hole 0.2, Top Layer to Bottom Layer, tented both sides, 20 vias
v3: diameter 0.7, hole 0.4, Top Layer to Bottom Layer, tented both sides, 12 vias
v4: diameter 0.7, hole 0.4, Top Layer to Bottom Layer, 12 vias
v5: diameter 0.5, hole 0.2, Top Layer to Bottom Layer, 2 vias

## Nets (pads, with @x,y where several pads share a name; then routed paths per layer and width w, separated by ;. In a path a pad name is that pad's centre, name@x,y a point inside that pad or via, vN(x,y) a via of type N, cw(c..) or ccw(c..) an arc to the next point about the centre after c; other vN are vias at no path point)
3V3B: D3.A1 R14.1 | length 4.2
  Top Layer w0.3: D3.A1 13.631,52.356 14.039,52.764 R14.1
5VG: D3.A2 R13.1 | length 4.1
  Top Layer w0.3: D3.A2 R13.1
+3V3: BOOT.2 C1.2 C3.2 C4.2 C5.2 C6.2 C7.2 C8.2 C11.2 C14.2 C20.2 C21.2 C22.2 HC-06.4 Motor1.4 Motor2.4 pad.21 R14.2 S1.1 S1.4 S2.1 S2.4 S3.1 S3.4 S4.1 S4.4 ST-LINK.2 U1.1 U1.13 U1.19 U1.32 U1.48 U1.64 U2.4 U3.4 U5.2 U5.4 U6.2 U6.3 U6.5 U6.8 | length 46.4
  Top Layer w0.2: v1(28.5,59.6) 28.936,59.164 U6.5 30.283,59.164 30.469,59.351 U6.3 U6.2 ; v1(29.9,55.8) 29.935,55.835 29.935,57.42 U6.8
  Top Layer w0.3: R14.2 17.247,52.6 v1(21.5,52.6) ; C22.2@27.121,59.6 v1(28.5,59.6) ; C21.2 v1(29.9,55.8) ; v2(35.166,69.628) 35.974,69.628 U1.32 ; C6.2 39.102,75.648 v2(40,74.75) 40.044,74.75 U1.19 ; v2(41.766,58.903) 41.766,58.957 41.4,59.323 41.4,59.911 U1.48 ; U1.13 47.553,74.549 47.553,74.615 v2(47.591,74.653) 47.613,74.675 47.613,75.353 C7.2 49.464,77.205 C8.2 ; U1.64 51.292,64.916 51.678,64.916 v2(51.716,64.878) ; U1.1 50.758,69.269 51.769,69.269 v1(51.8,69.3)
  Top Layer w0.4: C14.2 32.221,47.196 33.701,47.196 v1(33.711,47.206) 35.33,47.206 U3.4 ; C1.2 33.364,71.526 34.414,70.476 C3.2 34.414,70.403 35.166,69.651 v2(35.166,69.628) ; C4.2@41.168,57.626 41.168,57.768 41.197,57.738 41.338,57.738 41.766,58.166 v2(41.766,58.903) ; C11.2 48.21,47.19 49.69,47.19 v3(49.7,47.2) 51.219,47.2 U2.4 ; v2(51.716,64.878) 51.735,64.859 52.345,64.859 52.952,64.252 C5.2 ; v1(54.3,55.1) 54.312,55.112 56.661,55.112 U5.2 58.353,55.123 58.898,54.578 58.973,54.578 59.173,54.378 C20.2
  other v1: 48.273,53.823 48.273,55.123 48.273,56.423
+5: C17.2 C19.2 C23.2 pad.20 R9.1 R10.2 R13.2 U4.4 U4.5 U5.3 U7.5 | length 63.9
  Top Layer w0.2: U7.5 59.586,64.013 59.586,62.715 C23.2@59.881,62.419
  Top Layer w0.3: R13.2 17.139,51.2 v1(21.5,51.2) ; 59.3,56.679 59.3,60.8 59.88,61.38 C23.2
  Top Layer w0.4: C19.2 56.653,57.443 U5.3
  PWR w0.4: v1(21.5,51.2) 21.536,51.164 21.936,51.164 30.5,42.6 60.3,42.6 60.9,43.2 v1(60.9,49.1)
ADC_SENS0: pad.30 R17.2 S1.3 U1.24 | length 32
  Top Layer w0.2: R17.2 28.752,70.752 31.75,73.75 33.1,75.1 36.158,75.1 U1.24
  Top Layer w0.3: S1.3 16.396,70.752 R17.2
ADC_SENS1: pad.29 R18.2 S2.3 U1.23 | length 18.6
  Top Layer w0.2: S2.3 34.7,80.876 34.7,79 36.1,77.6 36.1,75.866 U1.23
  Top Layer w0.3: S2.3 38.824,85 R18.2
ADC_SENS2: pad.14 R21.2 S3.3 U1.16 | length 22.9
  Top Layer w0.2: U1.16 48.7,77.818 48.7,79.7 51.6,82.6 52.9,82.6 54.356,81.144 S3.3
  Top Layer w0.3: S3.3 56.091,79.509 58.824,76.776 59.486,76.776 R21.2
ADC_SENS3: pad.17 R22.2 S4.3 U1.9 | length 34.4
  Top Layer w0.2: U1.9 48.332,72.5 49,72.5 50.5,74 52.7,74 pad.17 57.9,68.8 R22.2@69.8,68.8
  Top Layer w0.3: R22.2@69.8,68.8 76.2,68.8 77.183,67.817 77.183,67.089 S4.3
BOOT0: BOOT.1 R27.2 U1.60 | length 69.5
  Top Layer w0.2: U1.60 48.894,64.496 50.09,63.3 v1(50.1,63.3) ; R27.2 53.176,3.667 53.176,3.067 53.743,2.5 BOOT.1@56.643,2.5
  Bottom Layer w0.2: v1(50.1,63.3) 53.3,60.1 53.3,54.9 56.1,52.1 56.1,3.443 BOOT.1
CURR_DRV1: pad.32 R7.2 U1.11 U2.1 | length 34.2
  Top Layer w0.2: U1.11@46.754,72.345 U1.11 45.5,71.082 45.5,69.1 47.6,67 52.784,67 pad.32 53.307,66.707 54.4,65.614 54.4,61.6 52.9,60.1 52.9,53 55.2,50.7 R7.2 55.105,49.705 U2.1
CURR_DRV2: pad.26 R8.2 U1.26 U3.1 | length 27.3
  Top Layer w0.2: U1.26 43.1,66.744 43.1,58.1 39.282,54.282 R8.2@39.282,49.935 ; U3.1 39.216,49.811 R8.2 R8.2@39.282,49.935 ; R8.2@39.253,49.965 R8.2@39.282,49.935
  Top Layer w0.3: U3.1 U3.1@39.264,47.178
Db_B_1: pad.2 R1.1 U1.28 | length 26.1
  Top Layer w0.3: R1.1 17.093,62.5 pad.2 24.4,62.5 29.4,67.5 37.276,67.5 38.979,69.203 38.979,69.451 38.666,69.764 U1.28
Db_B_2: pad.9 R2.1 U1.40 | length 27.9
  Top Layer w0.3: R2.1 17.114,57.6 pad.9 22.078,57.022 24.2,54.9 32.5,54.9 34.2,56.6 34.2,58.368 U1.40
Db_G_1: pad.3 R3.1 U1.27 | length 28.2
  Top Layer w0.3: R3.1 17.115,60.8 pad.3 24.8,60.8 30.9,66.9 37.6,66.9 39.794,69.094 39.794,69.343 U1.27
Db_G_2: pad.10 R4.1 U1.41 | length 28.6
  Top Layer w0.3: R4.1 17.094,56.1 pad.10 23.6,54 32.9,54 35.2,56.3 35.2,58.661 U1.41
Db_R_1: pad.4 R5.1 U1.33 | length 22.5
  Top Layer w0.3: R5.1 17.114,59.2 pad.4 24.9,59.2 31.15,65.45 36.333,65.45 U1.33
Db_R_2: pad.11 R6.1 U1.42 | length 29.3
  Top Layer w0.3: R6.1 17.094,54.5 pad.11 22.965,53.035 33.235,53.035 36.1,55.9 36.1,58.854 U1.42
ENCODER1_1: Motor1.3 pad.37 U1.55 | length 39.2
  Top Layer w0.2: U1.55 48,61.844 48,58.7 45.127,55.827 pad.37 45.127,51.127 44.7,50.7 44.7,30.7 46.807,28.593 Motor1.3
ENCODER1_2: Motor1.2 pad.38 U1.50 | length 40.3
  Top Layer w0.2: U1.50 46.2,60.109 46.2,57.9 43.9,55.6 pad.38 43.9,28 45.313,26.587 Motor1.2
ENCODER2_1: Motor2.3 pad.39 U1.14 | length 47.5
  Top Layer w0.2: Motor2.3 39.791,30.607 42.8,33.617 42.8,52.9 pad.39 42.7,55.7 44.1,57.1 44.1,67.6 44.7,68.2 44.7,72.404 U1.14
ENCODER2_2: Motor2.2 pad.40 U1.15 | length 46
  Top Layer w0.2: Motor2.2 37.673,32.56 39.76,32.56 42,34.8 42,50.9 41.6,51.3 pad.40 41.6,55.6 43.6,57.6 43.6,72.011 U1.15
FB_5V: R10.1 R11.2 U4.6 | length 3.8
  Top Layer w0.3: R11.2 64.216,51.241 64.216,52.68 R10.1 64.198,52.948 U4.6
FET_GATE0: pad.31 Q1.1 R23.2 U1.25 | length 21.4
  Top Layer w0.2: R23.2 29.1,69 34.2,74.1 36.451,74.1 U1.25
  Top Layer w0.3: Q1.1 22.904,66.83 R23.2@22.904,68.578
FET_GATE1: pad.41 Q2.1 R24.2 U1.17 | length 6.7
  Top Layer w0.2: U1.17 41.739,74.469 41.739,74.534 43.142,75.937 R24.2
  Top Layer w0.3: Q2.1 43.142,79.88 R24.2
FET_GATE2: pad.16@57.89,71.902 Q3.1 R25.2 U1.10 | length 17
  Top Layer w0.2: U1.10 48.125,73 48.9,73 50.5,74.6 53.2,74.6 55.898,71.902 Q3.1
  Top Layer w0.3: Q3.1 60.1,71.685 R25.2
FET_GATE3: pad.18 Q4.1 R26.2 U1.3 | length 17.4
  Top Layer w0.2: U1.3 50.475,70.4 53.7,70.4 55.1,69 pad.18@55.1,68.9 ; pad.18 56.449,67.551 R26.2
  Top Layer w0.3: R26.2 63.324,67.501 65.071,67.501
GND: -.1 C2.1 C3.1 C4.1 C5.1 C6.1 C7.1 C8.1 C9.1 C10.1 C11.1 C12.1 C13.1 C14.1 C15.1 C16.1 C17.1 C18.1 C19.1 C20.1 C21.1 C22.1 C23.1 D1.C1 D1.C2 D1.C3 D2.C1 D2.C2 D2.C3 D3.C1 D3.C2 D3.C3 HC-06.3 Motor1.1 Motor2.1 Q1.2 Q2.2 Q3.2 Q4.2 R7.1 R8.1 R11.1 R17.1 R18.1 R21.1 R22.1 R23.1 R24.1 R25.1 R26.1 R27.1 R29.1 ST-LINK.1 U1.12 U1.18 U1.31 U1.47 U1.63 U2.7 U2.9 U3.7 U3.9 U4.3 U4.9 U5.1 U6.6 U6.7 U6.12 U7.2 | length 75.4
  Top Layer w0.2: v1(28.5,58.5) 28.608,58.5 28.944,58.164 U6.7 U6.12 ; U6.7@29.763,58.264 U6.6 ; C23.1@58.3,62.335 C23.1 ; C23.1@58.47,62.348 58.55,62.428 v2(58.55,64.048) 58.575,64.073 58.575,66.156 U7.2
  Top Layer w0.3: R17.1 v1(18.617,74.054) ; v1(20.196,69.022) 21.278,69.022 R23.1 ; Q1.2 21.269,67.095 21.269,67.293 21.271,67.296 R23.1@21.271,68.541 ; C21.1 27.2,55.88 v2(27.2,57) C22.1 ; v2@36.079,70.229 U1.31 ; C6.1 40.049,76.72 v2(40.941,75.828) 40.941,74.56 U1.18 ; v2(40.7,59.9) 41.195,60.395 41.195,60.413 U1.47 ; R18.1 v1(43.9,85) ; R24.1 44.742,79.88 Q2.2 44.922,80 v2(46,80) ; U1.12 47.211,73.5 47.804,73.5 48.282,73.978 v2(48.316,73.978) ; U1.63 51.153,64.348 51.153,64.166 v2(51.191,64.128) ; C2.1 51.851,71.751 v2(52.5,72.4) ; R21.1 59.817,78.534 v2(59.817,79.756) ; R25.1 61.7,71.819 Q3.2 61.785,71.9 v1(63.1,71.9) ; R26.1@63.249,65.926 R26.1 63.425,65.8 65.4,65.8 Q4.2 65.6,65.6 v1(65.6,64.3) ; v2(63.5,61.7) R29.1 ; R22.1 v2(70.1,71.985)
  Top Layer w0.4: C3.1 35.465,71.477 35.465,71.194 36.022,70.636 36.022,70.472 v2(36.041,70.453) ; C4.1@40.011,59.211 v2(40.7,59.9) ; R8.1 40.956,49.862 40.956,48.444 v3(41,48.4) ; v2(48.316,73.978) 48.335,73.997 48.463,73.997 C7.1 49.368,74.939 50.568,76.139 C8.1 ; v2(51.191,64.128) 51.21,64.109 51.21,63.987 C5.1 ; v1(51.443,5.7) R27.1 ; v1(54.3,52.8) 54.311,52.811 56.685,52.811 56.713,52.783 59.133,52.783 C20.1 ; v3(56.8,48.3) R7.1 ; v1(61.373,51.123) 61.386,51.11 62.46,51.11 R11.1 ; C16.1 63.627,58.173 64.198,57.602 U4.3 ; v2(66.9,56.2) 66.919,56.219 67.739,56.219 C18.1
  Top Layer w0.5: C12.1 30.311,43.82 v1(30.311,45.127) ; C13.1 32.198,43.185 32.198,44.398 v1(32.2,44.4) ; C14.1 32.221,45.616 33.701,45.616 v1(33.711,45.606) ; v3@37.946,39.941 U3.7 ; v1(46.1,45.2) 46.1,43.812 C9.1 ; C10.1 v1(48.2,44.4) ; C11.1 48.21,45.61 49.59,45.61 v3(49.6,45.6) ; v3@53.835,39.835 U2.7 ; v1(53.9,60.1) 53.927,60.1 53.95,60.123 C19.1
  other v1: 7,50.125 7,51.225 7,54.825 7,55.925 62.4,58.8 6.9,59.325 62.4,59.7 6.9,60.525
  other v3: 53.8,39.8 37.911,39.906
  other v4: 52.1,43.7 53.2,43.7 54.4,43.7 36.211,43.706 37.311,43.706 38.511,43.706 52.1,45 53.2,45 54.4,45 36.211,45.177 37.311,45.177 38.511,45.177
  other v5: 63.9,55.8 65.1,55.8
HC06-RX: HC-06.2 U1.59 | length 67
  Top Layer w0.2: v1(47.3,65.8) 47.377,65.723 47.377,65.296 U1.59
  Bottom Layer w0.2: HC-06.2 43.1,8.1 44.5,9.5 44.5,46.8 47.3,49.6 v1(47.3,65.8)
HC06-TX: HC-06.1 U1.58 | length 66.8
  Top Layer w0.2: v1(46.5,64.8) 47.166,64.8 U1.58
  Bottom Layer w0.2: HC-06.1 40.4,2.86 40.4,7.4 42.6,9.6 42.6,47.2 46.1,50.7 46.1,64.4 v1(46.5,64.8)
INPUT_DRV1: pad.24 U1.57 U2.2 | length 18.8
  Top Layer w0.2: U1.57 51.935,59.323 51.935,52.165 pad.24 53.6,50.284 53.835,50.049 U2.2
INPUT_DRV2: pad.27 U1.44 U3.2 | length 16
  Top Layer w0.2: U3.2 38,47.184 38,50.814 38,59.34 U1.44
Interrupt1_IMU: pad.5 U1.34 U6.4 | length 10
  Top Layer w0.2: U6.4 29.969,60.669 33.4,64.1 35.689,64.1 U1.34
Interrupt2_IMU: U1.37 U6.9 | length 14
  Top Layer w0.2: U6.9 30.469,56.631 v2(31.3,55.8) ; v2(37.2,63.3) 37.257,63.357 37.257,63.547 U1.37
  Bottom Layer w0.2: v2(31.3,55.8) 32.1,55.8 37.2,60.9 v2(37.2,63.3)
LEDB1: D1.A1 R1.2 | length 4.4
  Top Layer w0.3: D1.A1 13.535,61.66 14.336,62.461 R1.2
LEDB2: D2.A1 R2.2 | length 4.3
  Top Layer w0.3: D2.A1 13.135,57.06 13.735,57.66 R2.2
LEDG1: D1.A2 R3.2 | length 4.1
  Top Layer w0.3: D1.A2 13.535,60.56 13.836,60.861 R3.2
LEDG2: D2.A2 R4.2 | length 4.1
  Top Layer w0.3: D2.A2 15.354,55.96 R4.2
LEDR1: D1.A3 R5.2 | length 4.1
  Top Layer w0.3: D1.A3 13.665,59.46 13.865,59.26 R5.2
LEDR2: D2.A3 R6.2 | length 4.2
  Top Layer w0.3: D2.A3 13.765,54.86 14.165,54.46 R6.2
MOTOR1_1: Motor1.6 pad.33 U2.6 | length 8.5
  Top Layer w0.6: Motor1.6 52.6,37.876 pad.33 52.565,38.835 U2.6
MOTOR1_2: Motor1.5 pad.34 U2.8 | length 12.7
  Top Layer w0.6: Motor1.5 51.256,32.556 55.1,36.4 pad.34 55.105,38.805 U2.8
MOTOR2_1: Motor2.6 pad.36 U3.6 | length 20.7
  Top Layer w0.6: U3.6 36.676,38.424 pad.36 36.7,38 34,35.3 34,26.6 35.987,24.613 Motor2.6
MOTOR2_2: Motor2.5 pad.35 U3.8 | length 18
  Top Layer w0.6: Motor2.5 37.476,26.788 36.612,26.788 35.4,28 35.4,34.8 39,38.4 pad.35 39.2,41.666 U3.8
NetQ1_3: Q1.3 R15.1 | length 3.8
  Top Layer w0.3: R15.1 19.788,64.812 20.5,64.1 21.724,64.1 Q1.3
NetQ2_3: Q2.3 R16.1 | length 3.3
  Top Layer w0.3: R16.1 43.912,82.5 Q2.3
NetQ3_3: Q3.3 R19.1 | length 3.5
  Top Layer w0.3: R19.1@57.4,74.5 57.498,74.402 Q3.3
NetQ4_3: Q4.3 R20.1 | length 2.1
  Top Layer w0.3: Q4.3 70.074,66.6 R20.1
NetR15_2: R15.2 S1.2 | length 6.9
  Top Layer w0.3: S1.2 15.302,64.802 17.312,66.812 R15.2
NetR16_2: R16.2 S2.2 | length 5.1
  Top Layer w0.3: S2.2 37.109,80.5 R16.2
NetR19_2: R19.2 S3.2 | length 4.8
  Top Layer w0.3: S3.2 54.679,76.4 R19.2
NetR20_2: R20.2 S4.2 | length 9.5
  Top Layer w0.3: R20.2 70.1,63.4 70.4,63.1 71,63.1 76,63.1 77.47,64.57 S4.2
NRST: C2.2 ST-LINK.3 U1.7 | length 80.7
  Top Layer w0.2: v1(47.3,69.7) 47.377,69.777 47.377,70.13 U1.7 49.462,72.216 50.101,72.216 C2.2
  Bottom Layer w0.2: ST-LINK.3 26.44,6.44 40.4,20.4 40.4,52.5 44.2,56.3 44.2,66.6 v1(47.3,69.7)
op+: R30.2 U7.1 | length 1.9
  Top Layer w0.2: U7.1 59.55,66.117 59.719,65.948 R30.2@61.35,65.948
op-: R31.2 U7.3 | length 2
  Top Layer w0.2: R31.2@55.85,65.848 57.364,65.848 57.381,65.866 57.494,65.866 57.65,66.022 U7.3
PG_5V: R9.2 U4.7 | length 6.3
  Top Layer w0.2: R9.2 64.723,49.323 65,49.6 65,54.456 64.998,54.458 64.998,54.623 U4.7
PWM_DRV1: pad.23 U1.56 U2.3 | length 20.5
  Top Layer w0.2: U1.56 48.8,61.751 48.8,58.5 46.9,56.6 46.9,53.2 49.6,50.5 pad.23 52.565,49.035 U2.3
PWM_DRV2: pad.28 U1.43 U3.3 | length 16.8
  Top Layer w0.2: U3.3 36.676,50.8 36.676,58.723 U1.43
PWM_FAN: U1.39
sig_vcc: pad.16@52.3,67.9 R31.1 U1.8 U7.4 | length 17.4
  Top Layer w0.2: U1.8 46.5,69.961 46.5,69.3 48.2,67.6 54.3,67.6 54.9,67 54.9,64.4 55.052,64.248 55.8,64.248 57.494,64.248 57.65,64.092 U7.4
SPI_MISO: pad.6 U1.35 U6.1 | length 8.6
  Top Layer w0.2: U6.1 31.469,60.469 32,61 33.296,61 U1.35
SPI_MOSI: pad.7 U1.36 U6.14 | length 8.9
  Top Layer w0.2: U6.14 32.764,59.164 36.6,63 36.6,63.596 U1.36
SPI_SCK: pad.8 U1.38 U6.13 | length 9.4
  Top Layer w0.2: U6.13 33.464,58.664 37.8,63 37.8,63.382 U1.38
SS_reg5V: C18.2 U4.8 | length 2.4
  Top Layer w0.3: U4.8 67.853,54.773 C18.2
SWCLK: ST-LINK.5 U1.49 | length 78.3
  Top Layer w0.2: U1.49 45.435,60.166 45.435,58.935 v1(45.4,58.9)
  Bottom Layer w0.2: ST-LINK.5 21.36,1.44 22,0.8 33.1,0.8 41.5,9.2 41.5,47.713 45.4,51.613 v1(45.4,58.9)
SWDIO: ST-LINK.4 U1.46 | length 69.3
  Top Layer w0.2: U1.46 41.389,61.341 42.5,62.452 v1(42.5,62.5)
  Bottom Layer w0.2: ST-LINK.4 23.9,6.9 39.4,22.4 39.4,53 42.5,56.1 v1(42.5,62.5)
Vbat: +.1 SW1.4 | length 13.5
  Bottom Layer w2.54: SW1.4 76.9,50.9 80.477,50.9 +.1
VCAP: C1.1 U1.30 | length 5.6
  Top Layer w0.3: C1.1 34.821,72.68 35.242,73.1 35.5,73.1 36.7,71.9 36.7,70.316 U1.30
VCC: C9.2 C10.2 C12.2 C13.2 C15.2 C16.2 pad.22 R12.2 R28.2 SW1.5 U2.5 U3.5 U4.1 U4.2 | length 40.1
  Top Layer w0.2: R12.2@16.917,49.582 R12.2 ; 69.9,59.8 R28.2
  Top Layer w0.3: R12.2@17.131,49.7 v1(21.5,49.7)
  Top Layer w0.8: C16.2 67.8,59.309 ; 67.8,59.2 68.676,59.2 ; 68.8,59.1 68.8,58.8 v1(70.8,56.8) 71.146,57.146 71.146,58.88 71.575,59.309 ; 71.298,49.211 71.298,49.308 71.619,49.629 73.479,49.629 ; C15.2@72.6,50.329 73.479,50.329 73.8,50.649 73.8,55.35 74.15,55.7 74.15,58.4 73.241,59.309
  PWR w0.8: v1(21.5,49.7) 21.5,48.3 28.784,41.016
  other v1: 69.7,53.8 70.8,53.8 69.7,54.8 70.8,54.8 69.7,55.8 70.8,55.8 69.7,56.8
  other v3: 46.2,40.2 48.2,40.2 30.211,40.306 32.211,40.306 49.6,40.6 33.611,41.606
vcc_op: pad.16@62,62.9 R28.1 R29.2 R30.1 | length 8.9
  Top Layer w0.2: R30.1 61.4,63.8 62.1,63.1 65.8,63.1 66.317,62.583 66.317,61.752 R29.2 R28.1
VccR: D3.A3 R12.1 | length 4.2
  Top Layer w0.3: D3.A3 13.869,50.156 14.277,49.748 R12.1
pads on no net: SW1.1 SW1.2 SW1.3 SW1.6 U1.2 U1.4 U1.5 U1.6 U1.20 U1.21 U1.22 U1.29 U1.45 U1.51 U1.52 U1.53 U1.54 U1.61 U1.62 U6.10 U6.11

## Polygon pours and split planes (outlines as drawn)
GND on Top Layer "NONET_L02_P-001" (solid, pour order 24): 60.8,60.2 60.1,59.5 60.1,58.1 60.3,57.9 63.4,57.9 63.7,57.6 64.4,57.6 64.4,60.2
VCC on Top Layer "Top Layer-VCC" (solid, pour order 19): 75.2,48.7 75.2,58.2 72.7,60.7 65,60.7 64.7,60.4 64.7,60.1 64.6,56.6 66.5,56.6 67.2,57.3 68.6,57.3 69.2,56.7 69.2,49.7 70.2,48.7
+5 on Top Layer "+5_L01_P014" (solid, pour order 14): 55.6,58.7 55.623,58.723 58.777,58.723 60.2,57.3 63.7,57.3 63.8,57.2 63.8,56.6 63.4,56.6 63.3,56.5 63.3,55.2 63.4,55.1 63.8,55.1 63.8,54.5 63.7,54.4 63.1,54.4 62.9,54.2 62.9,52.2 62.6,51.9 61.2,51.9 60.9,51.6 60.9,50.6 61.3,50.2 62.7,50.2 62.9,50 62.9,48.5 62.8,48.4 60.7,48.4 59.9,49.2 59.9,54.9 58.5,56.3 56,56.3 55.6,56.7
GND on Top Layer "GND_L01_P012" (solid, pour order 12): 9.2,62.125 7.5,62.125 6.5,61.125 6.5,49.525 9.2,49.525
VCC on Top Layer "VCC_L01_P005" (solid, pour order 5): 35.698,42.432 32.998,42.432 32.698,42.132 31.398,42.132 30.998,42.532 29.298,42.532 29.198,42.432 29.198,40.032 29.598,39.632 35.198,39.632 35.698,40.132
VCC on Top Layer "VCC_L01_P004" (solid, pour order 4): 51.6,42.4 48.9,42.4 48.6,42.1 47.3,42.1 46.9,42.5 45.2,42.5 45.1,42.4 45.1,40 45.5,39.6 51.1,39.6 51.6,40.1
+3V3 on Top Layer "+3V3_L01_P001" (solid, pour order 1): 51.3,56.7 50.7,57.3 48.2,57.3 47.8,56.9 47.8,53.5 48.3,53 50.8,53 51.3,53.5
VCC on Top Layer "VCC_L01_P000" (solid, pour order 0): 65,60 65,57.6 64.6,57.2 64.6,56.6 66.3,56.6 66.4,56.7 66.4,60
GND on GND "GND-GND" (solid, pour order 22): -7.1,7.7 1.6,-1 101.1,-1 107.8,5.7 105.5,8 66.3,8 22.5,8 18.1,12.4 18.1,22.6 19.5,24 26.1,24 28.2,26.1 28.2,32 28.3,32.1 26.7,33.7 21.154,33.7 19,35.854 19,42.5 22.5,46 30.8,46 31.7,45.1 34.2,45.1 35.4,46.3 46.4,46.3 47.7,45 49.7,45 50.3,45.6 50.3,46.1 63.1,46.1 63.3,46.3 83.1,46.3 87.8,51 101.7,48.7 105.3,48.7 107.5,50.9 107.5,85.1 87.7,104.9 11.9,104.9 -7.1,85.9
GND on GND "GND_L02_P020" (solid, pour order 20): 79.6,44.3 79.1,43.8 57.3,43.8 55.3,45.8 51.3,45.8 50.3,44.8 47.2,44.8 46.2,45.8 35.3,45.8 34.3,44.8 31.2,44.8 30.3,45.7 23.8,45.7 20,41.9 20,36.4 21.979,34.421 27.779,34.421 28.9,33.3 28.9,26.4 26,23.5 20.3,23.5 18.6,21.8 18.6,13.1 22.6,9.1 78.8,9.1 90.9,21.2 90.9,44.5
GND on GND "GND_L02_P007" (solid, pour order 7): 81.926,43.174 84.526,45.774 84.526,49.174 81.726,51.974 70.526,51.974 69.778,51.226 67.574,49.022 67.574,45.826 70.226,43.174
+3V3 on PWR "+3V3_L03_P009" (solid, pour order 9): 59.1,54.2 55.4,54.2 54.7,54.9 54.7,57.6 56,58.9 58.6,58.9 58.6,59.1 61.3,61.8 89.9,61.8 91.5,63.4 91.5,82.5 78.9,95.1 21.5,95.1 -1.9,71.7 -1.9,51.7 23,51.7 28.4,46.3 58.5,46.3 59.197,46.997
VCC on PWR "VCC_L03_P011" (solid, pour order 11): 65.1,60.8 64.6,60.3 64.6,56.6 67.3,56.6 67.3,46 63.5,42.2 28.6,42.2 25.7,39.3 25.7,33.6 74.7,33.6 77.6,36.5 77.6,44.7 79.9,47 79.9,58.6 77.8,60.7
+3V3 on PWR "+3V3_L03_P013" (solid, pour order 13): -2.5,59.681 -2.5,-3.9 0.9,-7.3 84.1,-7.3 92.5,1.1 92,1.6 92,28.1 87.6,32.5 24.7,32.5 19.9,37.3 19.9,59.238

## Silkscreen, mask and mechanical layers (free items; w line width, h text height)
Top Overlay:
  text "." at 65.8,57.756 h5
  text "|Mycro|" at 0.833,4.7 h5.5
  text "|gmariz|" at 1,2.3 h3
  text "JLCJLCJLCJLC" at 68.6,1.93 h2
  text "+" at 50.1,1.714 h3
  text "+" at 61.243,1.714 h3
  text "+" at 33.3,1.614 h3
Bottom Overlay:
  drawing of 8 lines, arcs and shapes, not listed
Mechanical 1:
  lines w0.254: 9.225,41.299 9.207,13.617 cw(c6.203,13.617) 6.203,10.613 3.763,10.603 ccw(c3.763,6.838) -0.002,6.838 -0.001,3.929 ccw(c3.93,3.929) 3.93,-0.002 83.02,-0.002 ccw(c83.02,3.929) 86.951,3.929 86.952,6.838 ccw(c83.187,6.838) 83.187,10.603 80.747,10.613 cw(c80.747,13.617) 77.743,13.617 77.725,41.299 ; 9.225,41.397 9.225,45.629 ccw(c6.274,45.629) 6.274,48.58 3.914,48.586 1.293,48.592 cw(c1.293,49.887) -0.001,49.887 cw(c50.919,54.935) 0,59.998 cw(c43.475,49.915) 86.95,59.998 cw(c36.031,54.935) 86.952,49.887 cw(c85.657,49.887) 85.657,48.592 80.676,48.58 ccw(c80.676,45.629) 77.725,45.629 77.725,41.397 ; 9.225,41.399 9.225,42.675

## Text inside footprints (layer, text, board x,y; h text height)
U2: Top 3D Body "*" at 54.356,46.33 h1.27 r270
U3: Top 3D Body "*" at 38.467,46.337 h1.27 r270
U6: Top 3D Body "*" at 31.084,59.955 h1.27 r270